# EAGLE board CPC_RAM512K_SN74_V2.00 (EAGLE 6.4)
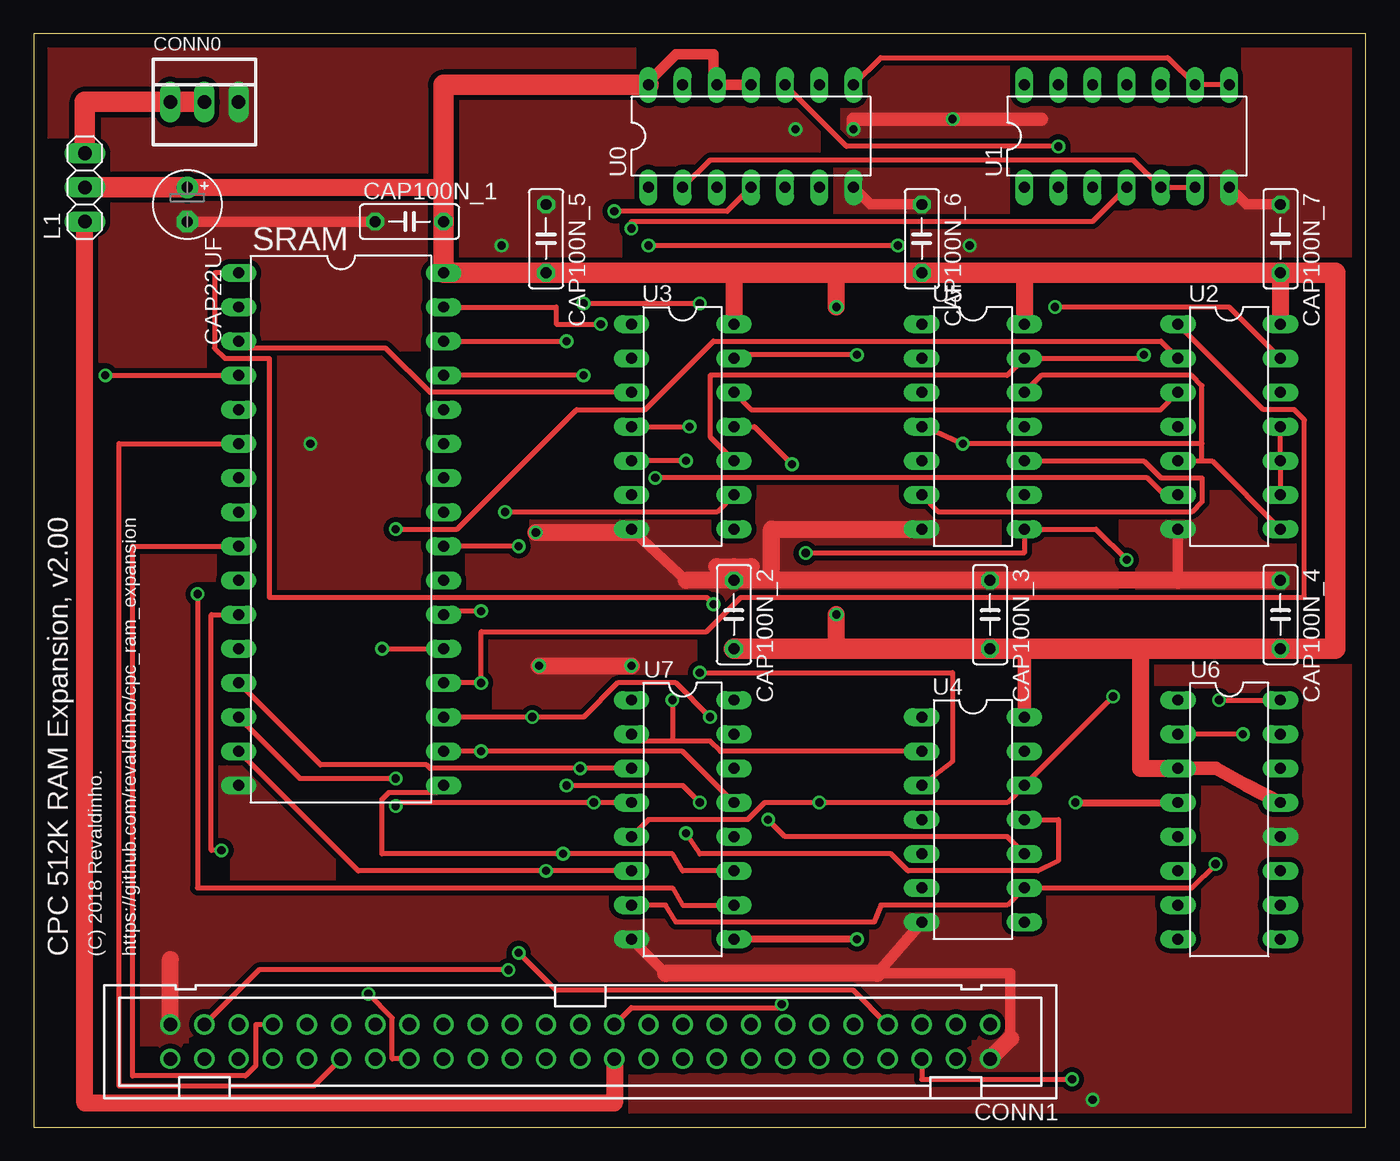
[diagram p0: board, top side]
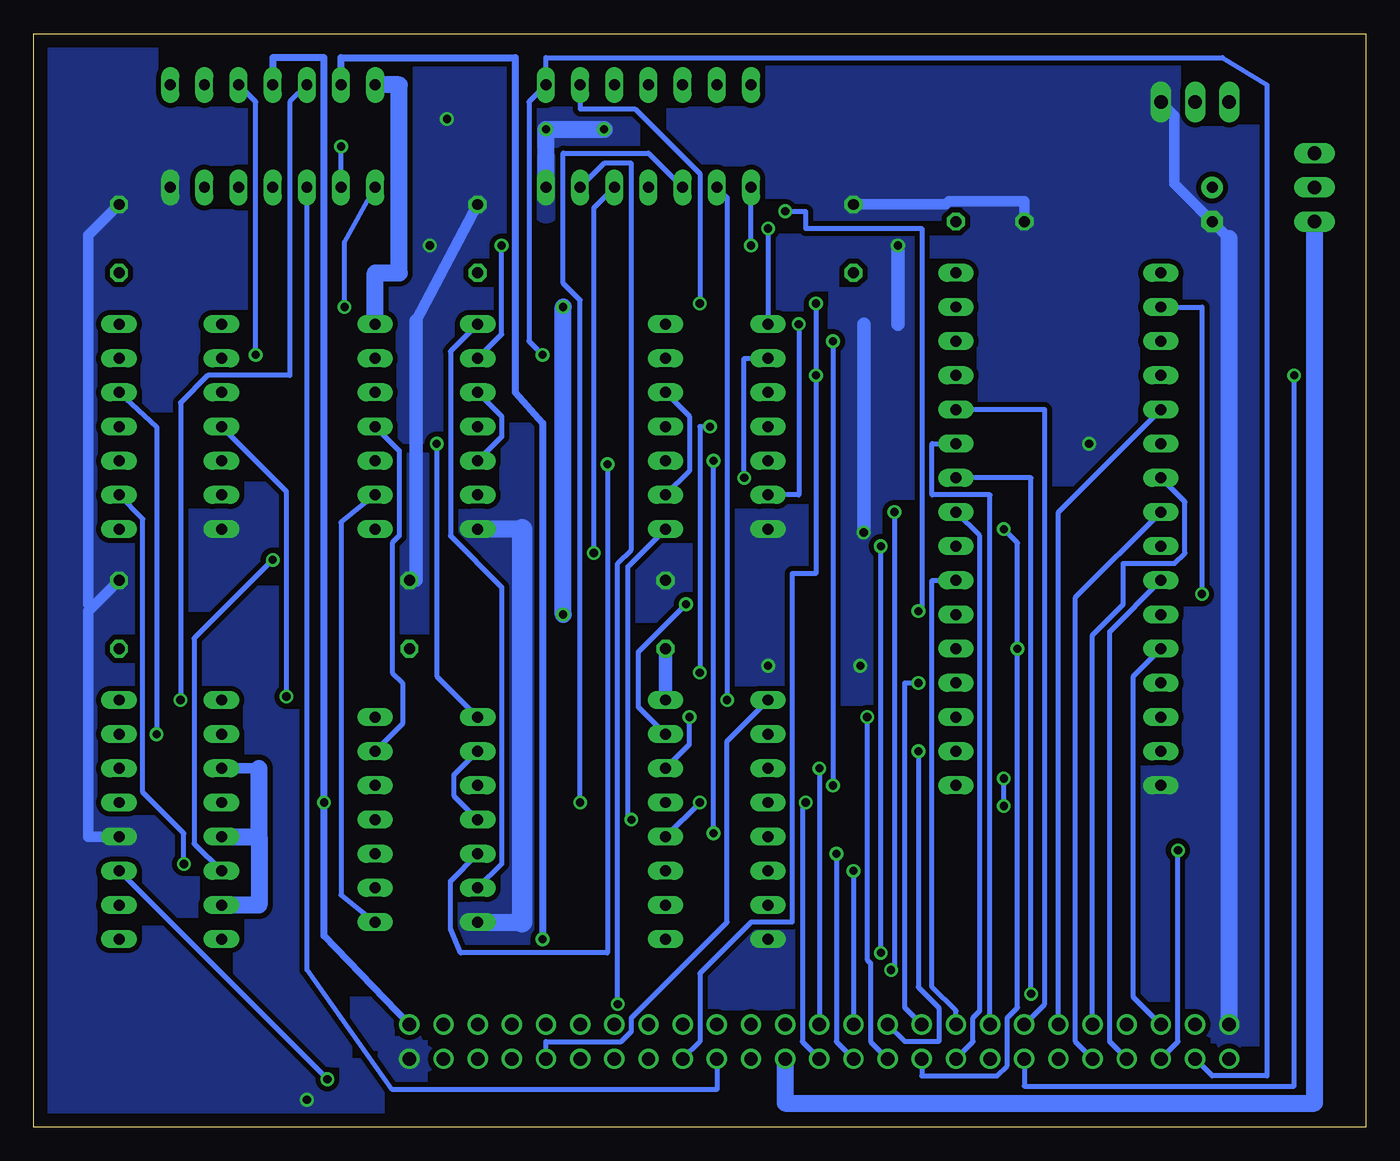
[diagram p1: board, bottom side, seen from below]

Size 99.06 x 81.28 mm. Coordinates in mm from the lower left corner, seen from the top.
Outline: 0,0 99.06,0 99.06,81.28 0,81.28 0,0
Copper layers (1*16): Top 0.035mm / dielectric 1.5mm / Bottom 0.035mm
Design rules "default": minimum track width 10mil, minimum drill 24mil, track to track 8mil, track to pad 8mil, pad to pad 8mil, via to via 8mil, smd to smd 8mil, copper to edge 40mil, drill to drill 8mil, minimum pad ring 10mil, minimum via ring 8mil, stop-mask expansion 4mil, vias tented up to drill 0mil, thermal gap 10mil
Net classes: 0 signal: width 0.356 mm, clearance 0.254 mm; 1 supply: width 0.762 mm, clearance 0.381 mm

## Footprints (pad centres in the part's own frame; a part is rotated, then mirrored left to right if it is on the bottom)
E2,5-5 = drill 0.813 pad 1.6: + -1.27,0 | drill 0.813 pad 1.6 octagon: - 1.27,0
C050-025X075 = drill 0.813 octagon: 1 -2.54,0; 2 2.54,0
22-23-2031 = drill 1 long: 1 -2.54,0; 2 0,0; 3 2.54,0
PAK100/2500-50 = drill 1 pad 1.422: 1 -30.48,-1.27; 2 -30.48,1.27; 3 -27.94,-1.27; 4 -27.94,1.27; 5 -25.4,-1.27; 6 -25.4,1.27; 7 -22.86,-1.27; 8 -22.86,1.27; 9 -20.32,-1.27; 10 -20.32,1.27; 11 -17.78,-1.27; 12 -17.78,1.27; 13 -15.24,-1.27; 14 -15.24,1.27; 15 -12.7,-1.27; 16 -12.7,1.27; 17 -10.16,-1.27; 18 -10.16,1.27; 19 -7.62,-1.27; 20 -7.62,1.27; 21 -5.08,-1.27; 22 -5.08,1.27; 23 -2.54,-1.27; 24 -2.54,1.27; 25 0,-1.27; 26 0,1.27; 27 2.54,-1.27; 28 2.54,1.27; 29 5.08,-1.27; 30 5.08,1.27; 31 7.62,-1.27; 32 7.62,1.27; 33 10.16,-1.27; 34 10.16,1.27; 35 12.7,-1.27; 36 12.7,1.27; 37 15.24,-1.27; 38 15.24,1.27; 39 17.78,-1.27; 40 17.78,1.27; 41 20.32,-1.27; 42 20.32,1.27; 43 22.86,-1.27; 44 22.86,1.27; 45 25.4,-1.27; 46 25.4,1.27; 47 27.94,-1.27; 48 27.94,1.27; 49 30.48,-1.27; 50 30.48,1.27
1X03 = drill 1.016 long: 1 -2.54,0; 2 0,0; 3 2.54,0
DIL32 = drill 0.813 long: 1 -19.05,-7.62; 2 -16.51,-7.62; 3 -13.97,-7.62; 4 -11.43,-7.62; 5 -8.89,-7.62; 6 -6.35,-7.62; 7 -3.81,-7.62; 8 -1.27,-7.62; 9 1.27,-7.62; 10 3.81,-7.62; 11 6.35,-7.62; 12 8.89,-7.62; 13 11.43,-7.62; 14 13.97,-7.62; 15 16.51,-7.62; 16 19.05,-7.62; 17 19.05,7.62; 18 16.51,7.62; 19 13.97,7.62; 20 11.43,7.62; 21 8.89,7.62; 22 6.35,7.62; 23 3.81,7.62; 24 1.27,7.62; 25 -1.27,7.62; 26 -3.81,7.62; 27 -6.35,7.62; 28 -8.89,7.62; 29 -11.43,7.62; 30 -13.97,7.62; 31 -16.51,7.62; 32 -19.05,7.62
DIL14 = drill 0.813 long: 1 -7.62,-3.81; 2 -5.08,-3.81; 3 -2.54,-3.81; 4 0,-3.81; 5 2.54,-3.81; 6 5.08,-3.81; 7 7.62,-3.81; 8 7.62,3.81; 9 5.08,3.81; 10 2.54,3.81; 11 0,3.81; 12 -2.54,3.81; 13 -5.08,3.81; 14 -7.62,3.81
DIL16 = drill 0.813 long: 1 -8.89,-3.81; 2 -6.35,-3.81; 3 -3.81,-3.81; 4 -1.27,-3.81; 5 1.27,-3.81; 6 3.81,-3.81; 7 6.35,-3.81; 8 8.89,-3.81; 9 8.89,3.81; 10 6.35,3.81; 11 3.81,3.81; 12 1.27,3.81; 13 -1.27,3.81; 14 -3.81,3.81; 15 -6.35,3.81; 16 -8.89,3.81

## Placement (x,y rotation side)
CAP22UF  [E2,5-5]  11.43,68.58 270 top
CAP100N_1  [C050-025X075]  27.94,67.31 0 top
CAP100N_2  [C050-025X075]  52.07,38.1 270 top
CAP100N_3  [C050-025X075]  71.12,38.1 270 top
CAP100N_4  [C050-025X075]  92.71,38.1 270 top
CAP100N_5  [C050-025X075]  38.1,66.04 270 top
CAP100N_6  [C050-025X075]  66.04,66.04 270 top
CAP100N_7  [C050-025X075]  92.71,66.04 270 top
CONN0  [22-23-2031]  12.7,76.2 0 top
CONN1  [PAK100/2500-50]  40.64,6.35 180 top
L1  [1X03]  3.81,69.85 90 top
SRAM  [DIL32]  22.86,44.45 270 top
U0  [DIL14]  53.34,73.66 0 top
U1  [DIL14]  81.28,73.66 0 top
U2  [DIL14]  88.9,52.07 270 top
U3  [DIL14]  48.26,52.07 270 top
U4  [DIL14]  69.85,22.86 270 top
U5  [DIL14]  69.85,52.07 270 top
U6  [DIL16]  88.9,22.86 270 top
U7  [DIL16]  48.26,22.86 270 top

## Library data of the parts
CAP22UF CAP100N_1-CAP100N_7 = resistor
CONN0 = con-molex
CONN1 = con-3m
L1 = pinhead
SRAM U0 U1-U7 = ic-package

## Nets
A0: CONN1.33 SRAM.23
A1: CONN1.34 SRAM.25
A2: CONN1.35 SRAM.27
A3: CONN1.36 SRAM.26
A4: CONN1.37 SRAM.28
A5: CONN1.38 SRAM.4
A6: CONN1.39 SRAM.5
A7: CONN1.40 SRAM.6
A8: CONN1.41 SRAM.7
A9: CONN1.42 SRAM.8
A10: CONN1.43 SRAM.9
A11: CONN1.44 SRAM.10
A12: CONN1.45 SRAM.12
A13: CONN1.46 SRAM.11
A14: CONN1.47 U2.3 U3.9 U3.12
A15: CONN1.48 U0.8 U1.8 U1.9 U3.13
BUSACK_B: CONN1.13
BUSRESET_B: CONN1.11
BUSRQ_B: CONN1.14
CLK: CONN1.1 U1.11 U6.4
CLKENB_LAT_Q: U1.12 U6.16
CURSOR: CONN1.5
D0: CONN1.25 SRAM.13 U7.3
D1: CONN1.26 SRAM.14 U7.4
D2: CONN1.27 SRAM.15 U7.6
D3: CONN1.28 SRAM.17 U7.11
D4: CONN1.29 SRAM.18 U7.13
D5: CONN1.30 SRAM.19 U7.14
D6: CONN1.31 SRAM.20 U2.1
D7: CONN1.32 SRAM.21 U2.2
EXP_B: CONN1.3
EXTRAM_B: U0.5 U5.8 U6.6
HALT_B: CONN1.17
INT_B: CONN1.16
IOREQ_B: CONN1.20 U1.3
LPEN: CONN1.4
M1_B: CONN1.22
MREQ_B: CONN1.23 U0.6
N14: U2.12 U6.2
N15: U1.1 U2.13
N16: U2.6 U3.2
N17: U1.4 U3.1
N18: U4.13 U5.11
N19: U3.5 U4.11
N20: U3.4 U4.3
N21: U1.10 U3.10 U5.13
N22: U3.8 U4.10
N23: U3.11 U4.5
N24: U0.1 U5.2
N25: U4.6 U5.1
N26: U5.3 U5.5
N27: U2.5 U2.8 U4.1 U5.4 U5.12
N28: U5.6 U5.10
N29: U4.8 U5.9
NMI_B: CONN1.15
NN1: U0.10 U1.2
RAMADRHI0: SRAM.3 U3.3
RAMADRHI1: SRAM.31 U3.6
RAMADRHI2: SRAM.2 U7.10
RAMADRHI3: SRAM.30 U7.12
RAMADRHI4: SRAM.1 U7.15
RAMBLOCK_Q0: U0.2 U1.5 U1.6 U4.2 U4.4 U7.2
RAMBLOCK_Q1: U0.3 U2.4 U4.12 U7.5
RAMBLOCK_Q2: U2.9 U2.10 U2.11 U4.9 U7.7
RAMCS_B: SRAM.22 U0.4
RAMDIS: CONN1.6 U6.11
RAMRD_B: CONN1.7 SRAM.24
RD_B: CONN1.19
READY: CONN1.12
RESET_B: CONN1.10 U7.1
RFSH_B: CONN1.21
ROMDIS: CONN1.8
ROMEN_B: CONN1.9
SOUND: CONN1.50
VDD [supply]: CAP22UF.+ CAP100N_1.2 CAP100N_2.2 CAP100N_3.2 CAP100N_4.2 CAP100N_5.2 CAP100N_6.2 CAP100N_7.2 L1.2 SRAM.32 U0.11 U0.12 U0.14 U1.14 U2.14 U3.14 U4.14 U5.14 U6.3 U6.5 U6.7 U6.13 U7.16
VDD_CPC [supply]: CONN1.24 L1.1
VDD_EXT [supply]: CONN0.1 CONN0.2 L1.3
VSS [supply]: CAP22UF.- CAP100N_1.1 CAP100N_2.1 CAP100N_3.1 CAP100N_4.1 CAP100N_5.1 CAP100N_6.1 CAP100N_7.1 CONN0.3 CONN1.2 CONN1.49 SRAM.16 U0.7 U1.7 U2.7 U3.7 U4.7 U5.7 U6.12 U7.8
WCLK_B: U1.13 U7.9
WR_B: CONN1.18 SRAM.29 U0.9

## Tracks (layer width: path | path; a pad name or v marks a point on that pad's centre or on a via)
A0
  Bottom 0.356: SRAM.23 32.26,40.64 32.26,10.41 30.48,8.64 CONN1.33
A1
  Bottom 0.356: SRAM.25 28.7,43.94 28.7,8.64 29.21,8.13 29.21,6.35 CONN1.34
A2
  Bottom 0.356: SRAM.27 32.26,50.8 32.26,46.99 27.94,46.99 CONN1.35
A3  (via drill 0.61)
  Top 0.356: v24.89,9.91 26.67,8.13 26.67,5.08 CONN1.36
  Bottom 0.356: SRAM.26 24.89,48.26 v24.89,9.91
A4
  Bottom 0.356: SRAM.28 23.88,53.34 23.88,9.14 CONN1.37
A5  (via drill 0.61)
  Top 0.356: v5.33,55.88 SRAM.4
  Bottom 0.356: v5.33,55.88 5.33,3.05 25.4,3.05 CONN1.38
A6
  Bottom 0.356: SRAM.5 22.86,45.72 CONN1.39
A7
  Top 0.356: SRAM.6 6.35,50.8 6.35,3.05 20.83,3.05 CONN1.40
A8
  Bottom 0.356: SRAM.7 13.46,46.48 13.46,42.67 14.22,41.91 18.03,41.91 18.03,38.86 20.32,36.58 CONN1.41
A9
  Bottom 0.356: SRAM.8 21.59,39.37 21.59,6.35 CONN1.42
A10
  Top 0.356: SRAM.9 7.37,43.18 7.37,3.81 15.75,3.81 16.51,4.57 16.51,7.62 CONN1.43
A11
  Bottom 0.356: SRAM.10 19.05,36.83 19.05,6.35 CONN1.44
A12
  Bottom 0.356: SRAM.12 17.27,33.53 17.27,9.65 CONN1.45
A13  (via drill 0.61)
  Top 0.356: SRAM.11 13.21,38.1 13.21,20.57 v13.97,20.57
  Bottom 0.356: v13.97,20.57 13.97,6.35 CONN1.46
A14  (via drill 0.61)
  Top 0.356: U2.3 83.82,53.34 53.34,53.34 U3.12 | CONN1.47 16.76,11.68 v35.31,11.68 | v35.05,45.72 50.8,45.72 U3.9
  Bottom 0.356: U3.9 50.29,48.77 50.29,52.83 U3.12 | v35.31,11.68 35.05,11.94 v35.05,45.72
A15  (via drill 0.61)
  Top 0.356: U1.8 U1.9 84.33,79.5 62.99,79.5 U0.8 | U3.13 52.32,57.4 v61.21,57.4
  Bottom 0.356: v61.21,57.4 62.23,58.42 62.23,76.2 U0.8 60.96,79.5 10.67,79.5 7.37,77.47 7.37,3.81 11.43,3.81 CONN1.48
CLK  (via drill 0.61)
  Top 0.508: v77.47,24.13 U6.4
  Bottom 0.508: CONN1.1 77.47,14.22 v77.47,24.13 77.47,79.5 81.28,79.5 U1.11
CLKENB_LAT_Q  (via drill 0.61)
  Top 0.356: v88.14,31.75 U6.16
  Bottom 0.356: v88.14,31.75 88.14,53.85 86.11,55.88 80.01,55.88 80.01,76.2 U1.12
D0  (via drill 0.61)
  Top 0.356: SRAM.13 21.34,26.92 29.21,26.92 29.46,26.67 v40.64,26.67 U7.3
  Bottom 0.356: v40.64,26.67 CONN1.25
D1  (via drill 0.61)
  Top 0.356: SRAM.14 19.81,25.91 v26.92,25.91 | v26.92,23.88 27.18,24.13 v41.66,24.13 U7.4
  Bottom 0.356: v26.92,23.88 v26.92,25.91 | CONN1.26 41.91,6.35 41.91,23.88 v41.66,24.13
D2  (via drill 0.61)
  Top 0.356: SRAM.15 24.13,19.05 v38.1,19.05 U7.6
  Bottom 0.356: v38.1,19.05 CONN1.27
D3  (via drill 0.61)
  Top 0.356: SRAM.17 29.97,24.89 26.42,24.89 25.91,24.38 25.91,20.32 v39.37,20.32 47.5,20.32 48.26,19.05 U7.11
  Bottom 0.356: CONN1.28 39.37,6.35 v39.37,20.32
D4  (via drill 0.61)
  Top 0.356: SRAM.18 v33.27,27.94 48.26,27.94 U7.13
  Bottom 0.356: CONN1.29 34.29,6.35 31.75,6.35 31.75,8.89 33.27,10.41 v33.27,27.94
D5  (via drill 0.61)
  Top 0.356: SRAM.19 v37.08,30.48 40.89,30.48 43.43,33.02 47.75,33.02 v50.29,30.48
  Bottom 0.356: v50.29,30.48 50.29,28.45 U7.14 | CONN1.30 36.83,6.35 36.83,12.19 37.08,12.45 v37.08,30.48
D6  (via drill 0.61)
  Top 0.356: v33.27,33.02 SRAM.20 | v33.27,33.02 33.53,33.02 | U2.1 91.44,53.34 93.73,53.34 94.49,52.58 94.49,39.37 52.58,39.37 50.04,36.83 33.27,36.83 v33.27,33.02
  Bottom 0.356: v33.27,33.02 34.29,33.02 34.29,8.89 CONN1.31
D7  (via drill 0.61)
  Top 0.356: v25.91,35.56 SRAM.21 | U2.2 83.82,58.42 50.55,58.42 45.47,53.34 40.39,53.34 31.5,44.45 v26.92,44.45
  Bottom 0.356: CONN1.32 33.02,3.81 27.43,3.81 26.67,4.57 26.67,8.13 25.91,8.89 v25.91,35.56 25.91,43.43 v26.92,44.45
EXTRAM_B  (via drill 0.61)
  Top 0.356: v81.28,42.16 78.99,44.45 U5.8 73.66,42.67 v57.4,42.67
  Bottom 0.356: U6.6 87.12,21.08 87.12,36.32 v81.28,42.16 | U0.5 57.4,68.33 v57.4,42.67
IOREQ_B
  Bottom 0.356: U1.3 78.74,11.68 72.39,2.79 48.26,2.79 CONN1.20
MREQ_B  (via drill 0.61)
  Top 0.356: v55.63,9.14 55.37,8.89 44.45,8.89 CONN1.23
  Bottom 0.356: U0.6 56.64,71.63 54.61,71.63 54.61,42.93 55.63,41.91 v55.63,9.14
N14  (via drill 0.61)
  Top 0.356: v89.92,29.21 U6.2
  Bottom 0.356: v89.92,29.21 89.92,52.07 U2.12
N15  (via drill 0.61)
  Top 0.356: v75.95,60.96 88.9,60.96 U2.13
  Bottom 0.356: U1.1 75.95,65.79 v75.95,60.96
N16  (via drill 0.61)
  Top 0.356: v46.23,48.26 82.8,48.26 84.07,46.99 U2.6
  Bottom 0.356: U3.2 46.23,57.15 v46.23,48.26
N17  (via drill 0.61)
  Top 0.356: v44.45,66.8 44.45,67.31 78.74,67.31 U1.4
  Bottom 0.356: v44.45,66.8 U3.1
N18
  Bottom 0.356: U4.13 71.63,29.97 71.63,33.02 72.39,33.78 72.39,43.43 71.88,43.94 71.88,50.29 U5.11
N19  (via drill 0.61)
  Top 0.356: v48.51,49.53 U3.5 | v48.51,21.84 49.53,20.32 63.75,20.32 65.02,19.05 74.68,19.05 76.2,19.81 76.2,22.86 U4.11
  Bottom 0.356: v48.51,21.84 v48.51,49.53
N20  (via drill 0.61)
  Top 0.356: U4.3 68.33,27.18 68.33,33.78 v49.53,33.78 | U3.4 v48.77,52.07
  Bottom 0.356: v49.53,33.78 49.53,52.07 v48.77,52.07
N21  (via drill 0.61)
  Top 0.356: U3.10 50.29,51.31 50.29,55.88 72.39,55.88 U5.13 82.3,57.15 v82.55,57.4
  Bottom 0.356: U1.10 82.55,76.2 v82.55,57.4
N22  (via drill 0.61)
  Top 0.356: v54.61,22.86 55.88,21.59 72.39,21.59 U4.10
  Bottom 0.356: U3.8 54.86,41.66 54.86,23.11 v54.61,22.86
N23  (via drill 0.61)
  Top 0.356: v56.39,49.28 53.59,52.07 U3.11
  Bottom 0.356: U4.5 68.07,18.29 68.07,14.73 67.31,12.95 56.39,12.95 v56.39,49.28
N24  (via drill 0.61)
  Top 0.356: v64.26,65.53 v45.72,65.53
  Bottom 0.356: v45.72,65.53 U0.1 | v64.26,65.53 64.26,58.93 U5.2
N25
  Bottom 0.356: U4.6 64.26,19.56 64.26,40.13 68.07,43.94 68.07,57.66 U5.1
N26
  Bottom 0.356: U5.5 64.26,51.31 64.26,52.83 U5.3
N27  (via drill 0.61)
  Top 0.356: U5.4 66.29,52.07 v69.09,50.8 86.87,50.8 | U5.12 74.93,55.88 86.11,55.88 86.87,55.12 86.87,50.8 | 86.87,49.53 86.87,50.8 | U2.5 86.87,49.53 | U2.8 87.63,49.53 86.87,49.53
  Bottom 0.356: U4.1 69.09,33.53 v69.09,50.8
N28
  Top 0.356: U5.6 67.31,45.72 86.11,45.72 86.87,46.48 86.87,48.26 83.82,48.26 82.55,49.53 U5.10
N29
  Bottom 0.356: U4.8 76.2,17.27 76.2,44.96 U5.9
NN1  (via drill 0.61)
  Top 0.356: U0.10 60.45,72.9 v76.2,72.9
  Bottom 0.356: U1.2 v76.2,72.9
RAMADRHI0
  Top 0.356: SRAM.3 15.75,57.91 26.16,57.91 29.46,54.61 U3.3
RAMADRHI1  (via drill 0.61)
  Top 0.356: SRAM.31 38.86,60.96 38.86,59.69 v42.16,59.69
  Bottom 0.356: U3.6 42.16,46.99 v42.16,59.69
RAMADRHI2  (via drill 0.61)
  Top 0.356: U7.10 48.26,16.51 47.5,17.78 12.19,17.78 v12.19,39.62
  Bottom 0.356: v12.19,39.62 12.19,60.96 SRAM.2
RAMADRHI3  (via drill 0.61)
  Top 0.356: v49.53,24.13 48.26,25.4 v39.62,25.4 | SRAM.30 v39.62,58.42
  Bottom 0.356: v49.53,24.13 U7.12 | v39.62,58.42 v39.62,25.4
RAMADRHI4  (via drill 0.61)
  Top 0.356: v50.55,38.86 50.04,39.37 17.53,39.37 17.53,57.15 14.22,57.15 13.46,57.91 13.46,63.5 SRAM.1
  Bottom 0.356: U7.15 54.1,31.24 54.1,35.31 v50.55,38.86
RAMBLOCK_Q0  (via drill 0.61)
  Top 0.356: U7.2 44.96,28.7 47.5,28.7 | 47.5,28.7 50.29,28.7 51.05,27.94 U4.2 | U0.2 50.29,71.88 81.79,71.88 U1.5 U1.6 | v47.5,31.75 47.5,28.7
  Bottom 0.356: U4.4 67.82,24.64 67.82,26.16 U4.2 | v47.5,31.75 47.5,69.09 U0.2
RAMBLOCK_Q1  (via drill 0.61)
  Top 0.356: U7.5 45.72,22.86 53.09,22.86 54.36,24.13 v58.42,24.13 72.39,24.13 U4.12 v80.26,32
  Bottom 0.356: U0.3 53.34,72.39 59.69,72.39 59.69,62.74 58.42,61.47 v58.42,24.13 | U2.4 80.26,47.24 v80.26,32
RAMBLOCK_Q2  (via drill 0.61)
  Top 0.356: U2.9 U2.10 U2.11 | U7.7 46.99,16.51 47.75,15.24 62.48,15.24 62.99,16.51 72.39,16.51 U4.9 86.11,17.78 v87.88,19.56
  Bottom 0.356: U2.9 90.93,45.21 90.93,24.89 87.88,21.84 v87.88,19.56
RAMCS_B  (via drill 0.61)
  Top 0.356: SRAM.22 30.73,38.35 v33.27,38.35 | v43.18,68.07 51.56,68.07 U0.4
  Bottom 0.356: v33.27,38.35 33.02,38.61 33.02,66.8 41.66,66.8 41.66,68.07 v43.18,68.07
RAMDIS  (via drill 0.61)
  Top 0.356: v77.22,3.56 66.04,3.56 CONN1.6
  Bottom 0.356: v77.22,3.56 U6.11
RAMRD_B  (via drill 0.61)
  Top 0.356: v36.07,43.18 SRAM.24 | v36.07,12.95 38.86,10.16 60.96,10.16 CONN1.7
  Bottom 0.356: v36.07,12.95 v36.07,43.18
RESET_B
  Bottom 0.356: U7.1 47.5,28.7 47.5,15.24 54.61,8.13 54.61,7.11 55.37,6.35 60.96,6.35 CONN1.10
VDD  (via drill 0.61)
  Top 0.762: U0.11 U0.12 50.55,77.72 50.55,79.76 47.75,79.76 45.97,77.98 U0.14
  Top 1.016: U6.13 90.17,25.4 87.88,26.67 U6.3 | 73.66,35.56 U4.14
  Top 1.27: CAP22UF.+ 30.48,69.85 CAP100N_1.2 | v59.69,60.96 59.69,63.5 | 59.69,35.56 v59.69,38.1 | 52.07,63.5 U3.14 | 73.66,63.5 U5.14 | CAP100N_7.2 U2.14 | U6.3 82.3,26.67 82.3,35.56
  Top 1.524: CAP100N_2.2 59.69,35.56 CAP100N_3.2 73.66,35.56 82.3,35.56 CAP100N_4.2 96.77,35.56 96.77,63.5 CAP100N_7.2 73.66,63.5 CAP100N_6.2 59.69,63.5 52.07,63.5 CAP100N_5.2 SRAM.32 CAP100N_1.2 30.48,77.47 U0.14 | CAP22UF.+ L1.2
  Bottom 0.762: 82.3,26.67 U6.3
  Bottom 1.016: CAP100N_2.2 U7.16
  Bottom 1.27: v59.69,38.1 v59.69,60.96 | U6.7 82.3,16.51 82.3,21.59 | U6.5 82.3,21.59 | 82.3,21.59 82.3,26.67 | U1.14 71.88,77.47 71.88,63.5 73.66,63.5 U5.14
VDD_CPC
  Top 1.27: CONN1.24 43.18,1.78 3.81,1.78 L1.1
  Bottom 1.27: CONN1.24 43.18,1.78 3.81,1.78 L1.1
VDD_EXT
  Top 1.524: L1.3 3.81,76.2 CONN0.1 CONN0.2
  Bottom 1.27: CONN0.2 12.7,76.45
VSS  (via drill 0.61)
  Top 0.762: U0.7 62.23,68.58 CAP100N_6.1 | U1.7 90.17,68.58 CAP100N_7.1 | 48.51,40.64 44.7,44.2 U3.7 | 85.09,40.64 U2.7 | CAP22UF.- CAP100N_1.1 | 46.99,11.43 U7.8 44.2,14.22 | U4.7 62.74,11.43 72.64,11.43 72.64,6.6 | 52.07,41.66 CAP100N_2.1
  Top 1.016: 74.93,74.93 v68.33,74.93 60.96,74.93 v60.96,74.17
  Top 1.27: CAP100N_4.1 85.09,40.64 CAP100N_3.1 CAP100N_2.1 48.51,40.64 | U5.7 54.86,44.45 54.86,41.15 | 62.74,11.43 46.99,11.43 | 72.64,6.6 CONN1.2 | 44.7,44.2 v37.34,44.2 | v37.59,34.29 v44.45,34.29 | 50.8,41.66 52.07,41.66 53.34,41.66 | CONN1.49 10.16,12.45
  Bottom 0.762: U6.12 95,21.59 95,38.35 94.74,38.61 | CAP100N_4.1 94.74,38.61 | CAP100N_7.1 95,66.29 95,38.86 94.74,38.61 | 70.61,59.94 CAP100N_6.1 | CAP100N_3.1 70.61,40.64 | CAP100N_5.1 31.24,68.58 30.99,68.83 25.4,68.83 CAP100N_1.1 | CONN0.3 14.22,75.18 14.22,70.1 CAP22UF.- 10.16,66.04 | v56.64,74.17 56.39,74.17
  Bottom 1.016: 70.61,40.64 70.61,59.94 | v37.34,44.2 37.34,59.69 | 34.8,59.69 v34.8,65.53
  Bottom 1.27: CONN1.49 10.16,66.04 | 62.74,44.45 U5.7 | U4.7 62.74,15.24 | U0.7 v60.96,74.17 v56.64,74.17
  Bottom 1.524: 62.74,15.24 62.74,44.45
  other vias: 69.6,65.53 78.74,2.03 20.57,50.8
  pour Top: 0,0 0,81.28 99.06,81.28 99.06,0
  pour Bottom: 0,0 0,81.28 99.06,81.28 99.06,0
WCLK_B  (via drill 0.61)
  Top 0.508: v61.21,13.97 U7.9
  Bottom 0.508: v61.21,13.97 61.21,52.32 63.25,54.61 63.25,79.5 76.2,79.5 U1.13
WR_B  (via drill 0.61)
  Top 0.356: v40.89,55.88 SRAM.29 | v49.53,61.21 v40.89,61.21
  Bottom 0.356: v40.89,61.21 v40.89,55.88 40.89,41.15 42.67,41.15 42.67,15.24 45.72,15.24 49.53,11.43 49.53,6.35 CONN1.18 | v49.53,61.21 49.53,70.87 54.36,75.69 58.42,75.69 U0.9

## Text on the board
tPlace: CPC 512K RAM Expansion, v2.00 | (C) 2018 Revaldinho. | https://github.com/revaldinho/cpc_ram_expansion